# EAGLE board digi part 1 new board (EAGLE 9.6.2), part 1 of 2
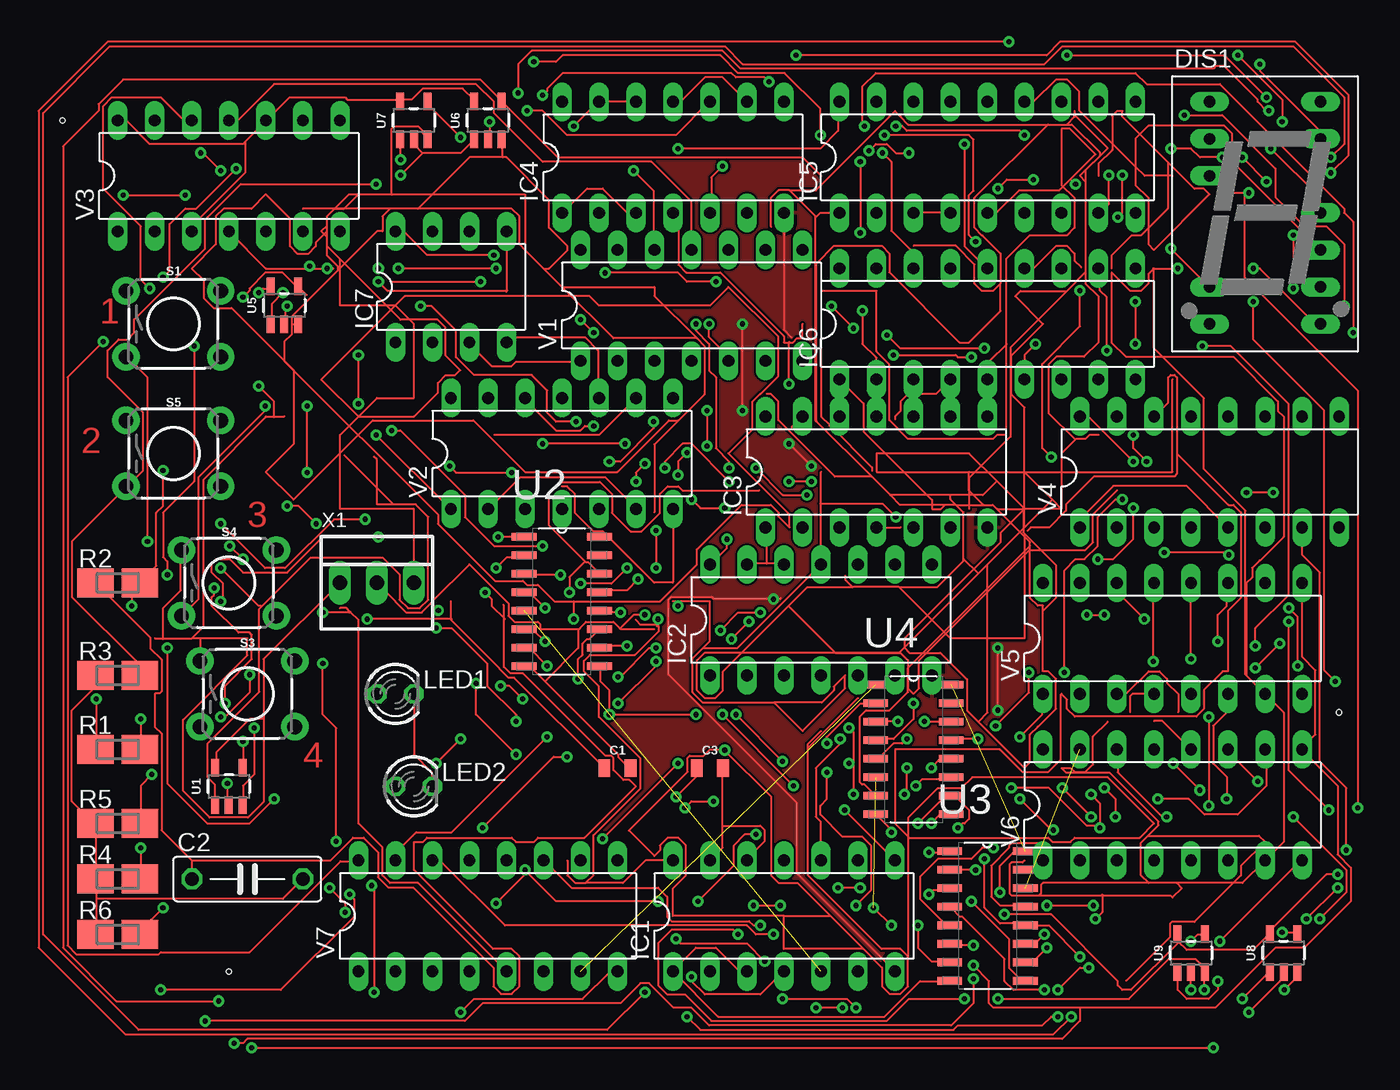
[diagram p0: board, top side]
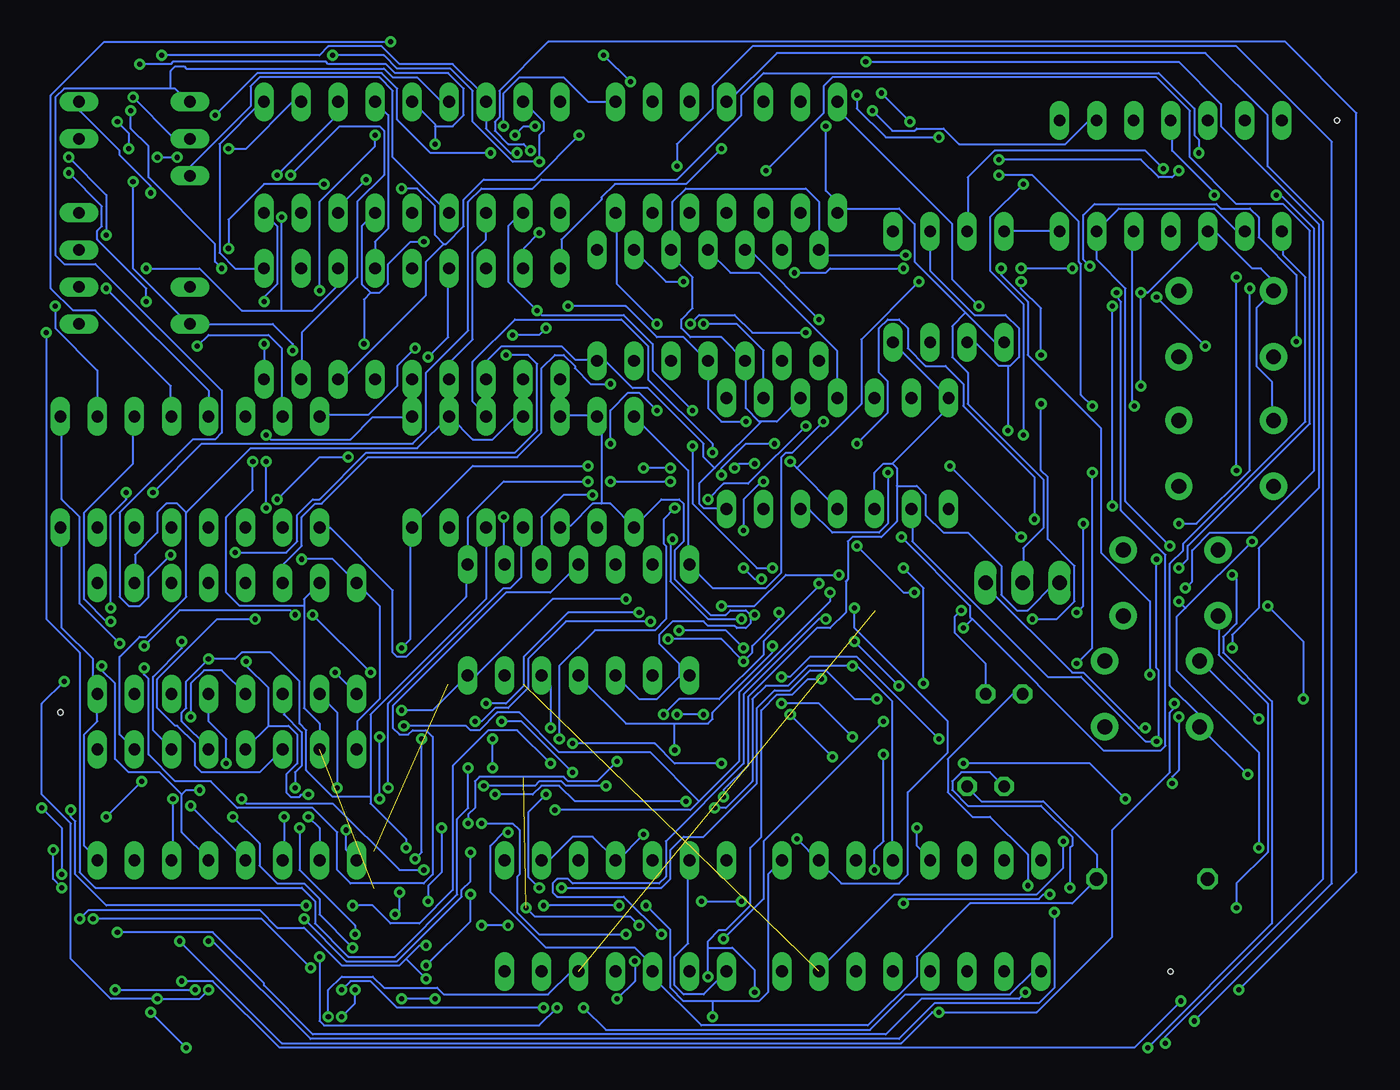
[diagram p1: board, bottom side, seen from below]

No outline drawn. Coordinates in mm, seen from the top.
Copper layers (1*16): Top 0.035mm / dielectric 1.5mm / Bottom 0.035mm
Design rules "default": minimum track width 6mil, minimum drill 0.35mm, track to track 6mil, track to pad 6mil, pad to pad 6mil, via to via 6mil, smd to smd 6mil, copper to edge 40mil, drill to drill 6mil, minimum pad ring 10mil, minimum via ring 8mil, stop-mask expansion 4mil, vias tented up to drill 0mil, thermal gap 10mil
Holes 0.35 mm at 10.16,5.08 -1.27,63.5 86.36,22.86

## Footprints (pad centres in the part's own frame; a part is rotated, then mirrored left to right if it is on the bottom)
0805 = smd 0.8 x 1.2: 1 -0.9,0; 2 0.9,0
C075-032X103 = drill 0.914 octagon: 1 -3.81,0; 2 3.81,0
HDSP-I = drill 0.813 long: 1 -3.81,7.62; 2 -3.81,5.08; 3 -3.81,2.54; 6 -3.81,-5.08; 7 -3.81,-7.62; 8 3.81,-7.62; 9 3.81,-5.08; 10 3.81,-2.54; 11 3.81,0; 13 3.81,5.08; 14 3.81,7.62
DIL14 = drill 0.813 long: 1 -7.62,-3.81; 2 -5.08,-3.81; 3 -2.54,-3.81; 4 0,-3.81; 5 2.54,-3.81; 6 5.08,-3.81; 7 7.62,-3.81; 8 7.62,3.81; 9 5.08,3.81; 10 2.54,3.81; 11 0,3.81; 12 -2.54,3.81; 13 -5.08,3.81; 14 -7.62,3.81
DIL18 = drill 0.813 long: 1 -10.16,-3.81; 2 -7.62,-3.81; 3 -5.08,-3.81; 4 -2.54,-3.81; 5 0,-3.81; 6 2.54,-3.81; 7 5.08,-3.81; 8 7.62,-3.81; 9 10.16,-3.81; 10 10.16,3.81; 11 7.62,3.81; 12 5.08,3.81; 13 2.54,3.81; 14 0,3.81; 15 -2.54,3.81; 16 -5.08,3.81; 17 -7.62,3.81; 18 -10.16,3.81
DIL08 = drill 0.813 long: 1 -3.81,-3.81; 2 -1.27,-3.81; 3 1.27,-3.81; 4 3.81,-3.81; 5 3.81,3.81; 6 1.27,3.81; 7 -1.27,3.81; 8 -3.81,3.81
LED3MM = drill 0.813 octagon: A -1.27,0; K 1.27,0
SMK = smd 2.5 x 2: 1 1.524,0; 2 -1.524,0
TACTILE_SWITCH_PTH_6.0MM = drill 1.016 pad 1.88: 1 -3.251,2.261; 2 3.251,2.261; 3 -3.251,-2.261; 4 3.251,-2.261
TACTILE_SWITCH_PTH_6.0MM_KIT = drill 1.016 pad 1.88: 1 -3.251,2.261; 2 3.251,2.261; 3 -3.251,-2.261; 4 3.251,-2.261
SOT23-5 = smd 0.55 x 1.2: 1 -0.95,-1.3; 2 0,-1.3; 3 0.95,-1.3; 4 0.95,1.3; 5 -0.95,1.3
SOIC127P600X175-16N = smd 1.702 x 0.533: 1 -2.591,4.445; 2 -2.591,3.175; 3 -2.591,1.905; 4 -2.591,0.635; 5 -2.591,-0.635; 6 -2.591,-1.905; 7 -2.591,-3.175; 8 -2.591,-4.445; 9 2.591,-4.445; 10 2.591,-3.175; 11 2.591,-1.905; 12 2.591,-0.635; 13 2.591,0.635; 14 2.591,1.905; 15 2.591,3.175; 16 2.591,4.445
DIL16 = drill 0.813 long: 1 -8.89,-3.81; 2 -6.35,-3.81; 3 -3.81,-3.81; 4 -1.27,-3.81; 5 1.27,-3.81; 6 3.81,-3.81; 7 6.35,-3.81; 8 8.89,-3.81; 9 8.89,3.81; 10 6.35,3.81; 11 3.81,3.81; 12 1.27,3.81; 13 -1.27,3.81; 14 -3.81,3.81; 15 -6.35,3.81; 16 -8.89,3.81
22-23-2031 = drill 1 long: 1 -2.54,0; 2 0,0; 3 2.54,0

## Placement (x,y rotation side)
C1  0.01uF  [0805]  36.83,19.05 0 top
C2  100uF  [C075-032X103]  11.43,11.43 0 top
C3  0.01uF  [0805]  43.18,19.05 0 top
DIS1  HD-E100  [HDSP-I]  81.28,57.15 0 top
IC1  74290N  [DIL14]  48.26,8.89 0 top
IC2  74290N  [DIL14]  50.8,29.21 0 top
IC3  74290N  [DIL14]  54.61,39.37 0 top
IC4  74290N  [DIL14]  40.64,60.96 0 top
IC5  4513N  [DIL18]  62.23,60.96 0 top
IC6  4513N  [DIL18]  62.23,49.53 0 top
IC7  ICM7555  [DIL08]  25.4,52.07 0 top
LED1  TLLY4400  [LED3MM]  21.59,24.13 0 top
LED2  TLLY4400  [LED3MM]  22.86,17.78 0 top
R1  1k  [SMK]  2.54,20.32 0 top
R2  15k  [SMK]  2.54,31.75 0 top
R3  15k  [SMK]  2.54,25.4 0 top
R4  15k  [SMK]  2.54,11.43 0 top
R5  15k  [SMK]  2.54,15.24 0 top
R6  15k  [SMK]  2.54,7.62 0 top
S1  MOMENTARY-SWITCH-SPST-PTH-6.0MM  [TACTILE_SWITCH_PTH_6.0MM]  6.35,49.53 0 top
S3  MOMENTARY-SWITCH-SPST-PTH-6.0MM-KIT  [TACTILE_SWITCH_PTH_6.0MM_KIT]  11.43,24.13 0 top
S4  MOMENTARY-SWITCH-SPST-PTH-6.0MM-KIT  [TACTILE_SWITCH_PTH_6.0MM_KIT]  10.16,31.75 0 top
S5  MOMENTARY-SWITCH-SPST-PTH-6.0MM-KIT  [TACTILE_SWITCH_PTH_6.0MM_KIT]  6.35,40.64 0 top
U1  74LVC1G08SE  [SOT23-5]  10.16,17.78 0 top
U2  74HC157D,652  [SOIC127P600X175-16N]  33.02,30.48 0 top
U3  74HC157D,652  [SOIC127P600X175-16N]  62.23,8.89 0 top
U4  74HC157D,652  [SOIC127P600X175-16N]  57.15,20.32 0 top
U5  74LVC1G08SE  [SOT23-5]  13.97,50.8 0 top
U6  74LVC1G08SE  [SOT23-5]  27.94,63.5 0 top
U7  74LVC1G08SE  [SOT23-5]  22.86,63.5 0 top
U8  SN74LVC1G32DCKR  [SOT23-5]  82.55,6.35 0 top
U9  SN74LVC1G32DCKR  [SOT23-5]  76.2,6.35 0 top
V1  7473N  [DIL14]  41.91,50.8 0 top
V2  7473N  [DIL14]  33.02,40.64 0 top
V3  7473N  [DIL14]  10.16,59.69 0 top
V4  7485AN  [DIL16]  77.47,39.37 0 top
V5  7485AN  [DIL16]  74.93,27.94 0 top
V6  7485AN  [DIL16]  74.93,16.51 0 top
V7  7485AN  [DIL16]  27.94,8.89 0 top
X1  22-23-2031  [22-23-2031]  20.32,31.75 0 top

## Library data of the parts
C1 C3 = SparkFun-Capacitors; PROD_ID: CAP-08469
C2 = rcl; SPICEPREFIX: C
DIS1 = display-hp; OC_FARNELL: unknown; OC_NEWARK: unknown
IC1-IC4 = 74xx-us
IC5 IC6 = 45xx
IC7 = maxim; MF: MAXIM; MPN: ICM7555IPA+; OC_FARNELL: 9663762; OC_NEWARK: 68K4387
LED1 LED2 = led; MF: VISHAY SEMICONDUCTOR; OC_FARNELL: 1612439
R1-R6 = resistor-shunt; OC_FARNELL: unknown; OC_NEWARK: unknown
S1 S3-S5 = SparkFun-Switches; PROD_ID: SWCH-08441; SF_SKU: COM-00097
U1 U5-U7 = SparkFun-IC-Logic; PROD_ID: IC-10841
U2-U4 = 74HC157D_652; AVAILABILITY: In Stock; DESCRIPTION: IC MULTIPLEXER 4 X 2:1 16SO; MF: Nexperia; MP: 74HC157D,652; PACKAGE: SO-16 Nexperia USA Inc.; PRICE: None; PURCHASE-URL: https://pricing.snapeda.com/search/part/74HC157D,652/?ref=eda
U8 U9 = SparkFun-IC-Logic; PROD_ID: IC-10842
V1-V7 = 74ttl-din
X1 = con-molex; MF: MOLEX; MPN: 22-23-2031; OC_FARNELL: 1462950; OC_NEWARK: 30C0862

## Nets
3.3V: C1.2 C2.2 C3.2 DIS1.6 IC1.1 IC1.3 IC1.12 IC1.13 IC2.1 IC2.3 IC2.12 IC2.13 IC3.1 IC3.3 IC3.12 IC3.13 IC4.1 IC4.3 IC4.12 IC4.13 IC5.5 IC6.5 IC7.1 LED1.K LED2.K R3.2 R4.2 R5.2 R6.2 U2.8 U3.8 U4.8 X1.2
5V: C3.1 DIS1.3 DIS1.14 IC5.3 IC5.4 IC6.3 IC6.4 IC7.4 IC7.8 R1.1 S1.1 S3.1 S4.1 S5.1 U1.5 U2.16 U3.16 U4.16 U5.5 U6.5 U7.5 U8.5 U9.5 V1.3 V1.7 V1.10 V1.14 V2.3 V2.7 V2.10 V2.14 V3.3 V3.7 V3.10 V3.14 X1.1
+UB: V1.4 V2.4 V3.4 V4.16 V5.16 V6.16 V7.16
-5V: U1.3 U5.3 U6.3 U7.3 U8.3 U9.3 X1.3
-UB: V1.11 V2.11 V3.11 V4.8 V5.8 V6.8 V7.8
GND: IC1.7 IC2.7 IC3.7 IC4.7
N$1: U1.1 V1.5 V1.12
N$2: U1.2 V1.9
N$3: U1.4 V2.2 V2.6 V3.2 V3.6
N$4: IC1.10 V2.12
N$5: IC1.9 IC1.11 U2.2 V4.10
N$6: IC2.9 IC2.11 U2.3 V4.9
N$7: U4.1 U6.1 U7.2 V7.7
N$8: IC4.9 IC4.11 U3.3 V5.9 V6.9
N$9: IC2.10 V2.9
N$10: IC3.10 V3.12
N$11: IC4.10 V3.9
N$12: IC4.8 U3.13 V5.1 V6.1
N$13: IC1.4 U2.11 V4.13
N$14: IC4.4 U3.10 V5.14 V6.14
N$15: IC4.5 U3.6 V5.11 V6.11
N$16: U2.1 U5.1 V4.7
N$17: V5.4 V6.4
N$18: V5.3 V6.3
N$19: V5.2 V6.2
N$20: IC3.8 U3.14 V5.15 V6.15
N$21: IC3.4 U3.11 V5.13 V6.13
N$22: IC3.5 U3.5 V5.12 V6.12
N$23: IC3.9 IC3.11 U3.2 V5.10 V6.10
N$24: U3.1 U6.2 V5.7 V6.7
N$25: V5.6 V6.6
N$26: U7.1 V5.5 V6.5
N$28: IC1.5 U2.5 V4.12
N$29: IC2.8 U2.13 V4.1 V4.5
N$30: IC2.4 U2.10 V4.14
N$31: IC1.8 U2.14 V4.15
N$32: IC2.5 U2.6 V4.11
N$33: IC5.1 IC6.1 U4.7
N$34: U3.7 U4.6 V7.11
N$35: IC5.2 IC6.2 U4.9
N$36: U5.2 V7.5
N$37: U2.4 U4.2 V7.10
N$38: U2.7 U4.5 V7.12
N$39: U2.9 U4.11 V7.13
N$40: U2.12 U4.14 V7.15
N$41: U3.4 U4.3 V7.9
N$43: U3.9 U4.10 V7.14
N$44: U3.12 U4.13 V7.1
N$46: LED2.A U9.4
N$47: IC5.6 IC6.6 U4.12
N$48: IC5.7 IC6.7 U4.4
N$49: IC5.8 IC6.8
N$50: IC5.10 IC6.10
N$51: DIS1.7 IC5.11 IC6.11
N$52: DIS1.8 IC5.12 IC6.12
N$53: DIS1.10 IC5.13 IC6.13
N$54: DIS1.13 IC5.14 IC6.14
N$55: DIS1.1 IC5.15 IC6.15
N$56: DIS1.11 IC5.16 IC6.16
N$57: DIS1.2 IC5.17 IC6.17
N$58: U5.4 U8.2
N$59: U7.4 U8.1 U9.2
N$60: U6.4 U9.1
N$61: LED1.A U8.4
N$62: IC7.3 V1.1
N$63: C1.1 IC7.5
N$64: R3.1 S5.3 V2.1
N$65: IC7.7 R1.2 R2.1
N$66: C2.1 IC7.2 IC7.6 R2.2
N$67: R5.1 S3.3 V3.1
N$68: R6.1 S4.3 V3.5
N$69: R4.1 S1.3 V2.5
VCC: IC1.14 IC2.14 IC3.14 IC4.14
VDD: IC5.18 IC6.18
VSS: IC5.9 IC6.9

## Tracks (layer width: path | path; a pad name or v marks a point on that pad's centre or on a via)
3.3V  (via drill 0.35)
  Top 0.152: 24.05,30.36 23.39,29.71 22.33,29.71 21.57,30.46 21.57,30.5 X1.2 | 24.05,30.36 24.15,30.46 24.15,30.5 26.67,33.02 29.35,30.34 29.35,29.48 29.76,29.07 31.38,29.07 31.51,28.94 31.51,28.57 34.17,28.57 34.27,28.67 | 39.37,28.57 37.05,28.57 37,28.62 | 34.27,28.67 34.66,29.07 36.56,29.07 37,28.62 | IC5.5 62.85,57.15 64.4,58.7 67.16,58.7 67.93,59.47 | 67.93,59.47 69.63,61.18 67.89,62.92 67.31,62.92 67.31,59.07 68.2,58.18 68.2,56.12 67.68,55.6 65.11,55.6 63.5,53.99 63.5,48.16 | 63.5,48.16 63.5,41.91 62.88,41.91 62.6,41.63 56.78,41.63 55.5,42.91 55.5,46.75 54.61,47.64 54.61,51.79 50.8,51.79 50.8,43.18 51.41,42.57 | 51.41,42.57 54.3,39.67 54.3,39.46 | 48.79,42.44 IC3.13 50.11,43.76 | v55.63,14.63 55.63,14.78 54.56,15.85 U4.8 | 44.04,15.09 44.04,13.56 IC1.13 | 44.04,15.09 44.04,19.05 C3.2 | 44.04,15.09 46.63,15.09 46.94,14.78 46.94,14.02 45.72,12.8 IC1.12 | U3.8 59.59,4.42 57.61,4.42 55.17,1.98 43.74,1.98 IC1.1 40.69,5.18 42.22,6.71 43.59,6.71 45.11,5.18 45.72,5.18 IC1.3 | 1.07,11.43 1.07,10.06 | 1.07,10.06 1.07,7.62 R6.2 | 1.07,11.43 1.07,15.24 R5.2 0.91,15.24 -0.61,16.76 -0.61,23.01 0.91,24.54 0.91,25.3 R3.2 | 1.07,11.43 R4.2 | LED1.K 22.86,19.96 24.08,18.75 24.08,17.83 LED2.K | 1.07,10.06 13.87,10.06 C2.2 | 31.85,24.99 30.94,25.91 30.48,25.91 U2.8 | 31.85,24.99 36.88,19.96 36.88,19.81 37.64,19.05 C1.2 | 31.85,24.99 34.14,27.28 34.14,28.5 34.29,28.65 34.27,28.67 | IC4.12 IC4.13 35.51,64.77 v33.83,63.09 | IC4.3 37.49,57.15 35.81,58.83 34.75,58.83 33.07,57.15 IC4.1 | 47.09,33.07 48.16,33.07 IC2.12 | 47.09,33.07 45.72,33.07 IC2.13 | 47.09,33.07 47.09,35.51 IC3.1 | IC6.5 62.33,45.72 62.33,46.94 63.55,48.16 63.5,48.16
  Top 0.152: v74.83,54.71 DIS1.6 | 67.93,59.47 v68.28,59.13 | 51.41,42.57 51.97,43.13 IC3.12 | 51.36,42.52 51.41,42.57 | 37,28.62 37.95,29.57 v38.71,29.57 | 24.05,30.36 v24.54,29.87
  Bottom 0.152: v55.63,14.63 55.93,14.63 56.84,13.72 56.84,10.52 53.03,6.71 46.94,6.71 45.72,5.49 IC1.3 45.72,4.72 42.37,1.37 30.94,1.37 27.58,4.72 27.58,6.1 23.93,9.75 16.92,9.75 C2.2 15.24,13.11 18.9,16.76 23.16,16.76 24.08,17.68 LED2.K | IC1.1 42.22,3.5 43.59,3.5 44.2,4.12 44.2,6.1 43.28,7.01 43.28,12.65 IC1.13 | 24.23,50.29 27.74,53.8 27.74,56.39 28.8,57.45 32.61,57.45 | 24.23,50.29 22.25,48.31 21.64,48.31 IC7.1 | 32.61,57.45 32.92,57.15 IC4.1 32.61,57.45 | v33.83,63.09 33.83,58.67 32.61,57.45 | 24.23,50.29 25.15,49.38 25.15,47.24 24.08,46.18 24.08,44.04 18.9,38.86 18.9,35.51 20.27,34.14 20.27,31.85 X1.2 | 43.89,25.3 43.28,25.3 IC2.1 | 43.89,25.3 45.41,23.77 46.63,23.77 IC2.3 | 49.23,37.19 48.62,37.19 IC3.1 46.94,35.66 45.11,37.49 43.89,37.49 43.59,37.19 43.59,34.59 44.2,33.98 44.2,32 41.76,29.57 40.69,29.57 40.39,29.87 39.32,29.87 39.01,29.57 | 49.23,37.19 49.84,37.19 51.36,35.66 51.97,35.66 IC3.3 | 43.89,25.3 43.89,26.21 45.26,27.58 45.26,28.19 44.35,29.11 42.22,29.11 41.91,28.8 40.08,28.8 39.93,28.65 39.32,28.65 39.01,28.96 39.01,29.57 | IC3.12 51.97,43.28 49.53,43.28 IC3.13 49.53,43.13 49.23,42.82 49.23,37.19 | v74.83,54.71 74.83,56.69 72.39,59.13 v68.28,59.13 | 39.01,29.57 v38.71,29.57 | LED1.K 22.86,26.21 24.99,28.35 24.99,29.41 v24.54,29.87
5V  (via drill 0.35)  (1 unrouted)
  Top 0.152: V2.7 40.64,31.8 40.62,31.77 39.34,31.77 35.87,35.26 | 35.87,35.26 35.84,35.28 35.19,35.28 33.91,36.56 33.91,37.86 33.39,38.38 33.02,38.38 | 5.08,27.94 5.64,27.94 | 5.64,27.94 7.62,27.94 | 7.62,27.94 8.43,28.75 8.43,38.86 12.7,43.13 12.7,43.18 13.26,43.18 | 13.26,43.18 13.97,43.18 | 12.55,22.4 12.55,26.52 X1.1 | 12.55,22.4 12.55,16.72 11.48,15.65 8.84,15.65 7.01,17.48 7.01,22.35 11.43,26.77 11.43,27.94 8.23,27.94 | 8.23,27.94 7.62,27.94 | 56.7,44.65 56.78,44.73 58.7,44.73 IC6.4 | 56.7,44.65 56.26,44.21 56.26,43.56 55.88,43.18 55.88,42.96 | 75.29,7.16 75.29,7.62 U9.5 75.29,7.16 | 75.29,7.16 75.89,6.55 80.47,6.55 81.53,7.62 U8.5 81.69,7.77 81.69,7.92 85.5,11.73 v86.26,11.73 | v63.09,10.52 63.09,12.34 64.01,13.26 64.77,13.26 U3.16 | v63.4,8.99 66.6,8.99 71.17,4.42 71.17,4.12 71.48,3.81 72.08,3.81 75.29,7.01 75.29,7.16 | IC5.4 IC5.3 | 79.86,58.52 78.64,58.52 DIS1.3 | v87.63,16.31 87.63,44.96 79.86,52.73 79.86,58.52 | 79.86,58.52 v80.16,58.52 | v28.35,54.25 23.77,54.25 22.25,55.78 21.64,55.78 IC7.8 | IC6.3 56.69,45.26 56.69,44.65 56.7,44.65 | 35.87,35.26 35.66,35.05 U2.16 | v12.19,51.66 12.5,51.97 12.95,51.97 U5.5 | U6.5 26.98,64.92 26.21,65.68 23.47,65.68 22.71,64.92 21.95,64.92 U7.5 21.79,64.92 18.29,64.92 18.14,65.08 14.33,65.08 12.8,63.55 V3.10 12.65,63.4 11.28,62.03 | 11.28,62.03 11.12,61.87 4.72,61.87 3.2,63.4 2.59,63.4 V3.14 | V3.3 7.62,56.24 11.28,59.89 11.28,62.03 | 12.55,22.4 11.58,22.4 9.3,20.12 9.3,19.2 U1.5 | v4.12,22.4 4.12,20.42 R1.1 | 8.23,27.94 8.23,26.52 S3.1 | 5.64,27.94 5.64,30.02 6.86,31.24 6.86,33.98 S4.1 | 5.64,27.89 5.64,27.94 | v40.84,17.07 42.22,18.44 42.22,19.05 C3.1
  Top 0.152: v12.19,45.26 13.26,44.2 13.26,43.18 | 13.26,43.13 13.26,43.18 | IC7.4 29.57,48.62 34.59,48.62 35.51,47.7 35.51,44.5 V2.10
  Bottom 0.152: v63.09,10.52 63.09,9.3 v63.4,8.99 | DIS1.3 77.42,59.74 77.42,60.35 73.3,64.47 73.3,65.84 72.69,66.45 64.47,66.45 63.55,65.53 63.55,60.96 59.74,57.15 IC5.4 | v80.16,58.52 80.16,58.98 82.3,61.11 82.3,61.42 85.04,64.16 85.04,64.77 DIS1.14 | v86.26,11.73 86.26,14.94 v87.63,16.31 | V3.7 17.83,55.93 21.49,55.93 IC7.8 | v28.35,54.25 33.98,54.25 34.29,54.56 V1.14 34.29,57.91 35.2,58.83 43.43,58.83 44.35,57.91 44.35,54.71 V1.10 44.35,54.56 44.35,54.1 42.98,52.73 42.98,50.6 43.74,49.84 43.74,49.23 43.13,48.62 41,48.62 V1.3 39.32,46.94 39.32,43.74 38.41,42.82 38.25,42.82 | IC6.3 57.15,46.94 56.08,48.01 51.97,48.01 51.05,47.09 49.53,47.09 V1.7 49.53,46.94 48.92,46.94 47.09,45.11 46.02,45.11 42.22,41.3 42.22,40.39 41.45,39.62 | 38.25,42.82 41.45,39.62 | 41.45,39.62 42.52,38.56 42.52,37.19 42.22,36.88 40.69,36.88 V2.7 | 38.25,42.82 37.19,42.82 V2.10 | 7.62,55.78 11.73,51.66 v12.19,51.66 v12.19,45.26 | S5.1 3.2,42.98 3.2,45.57 4.27,46.63 4.27,50.6 3.2,51.66 S1.1 3.2,51.82 3.2,52.58 3.96,53.34 4.57,53.34 7.01,55.78 7.62,55.78 | 7.62,55.78 V3.3 | v4.12,22.4 8.08,26.36 S3.1 | IC7.4 V2.14 25.45,44.35 25.45,43.74 29.26,39.93 | v40.84,17.07 40.84,17.53 39.17,19.2 39.17,23.93 34.44,28.65 33.53,28.65 32.46,29.72 32.46,31.85 32.31,32 32.31,34.59 32,34.9 30.02,34.9 28.96,35.97 28.96,38.41 | 28.96,38.41 28.96,39.62 29.26,39.93 | 29.26,39.93 29.87,39.93 30.48,39.32 V2.3 | 28.96,38.41 27.58,38.41 26.98,37.8 26.98,36.42 25.76,35.2 24.08,35.2 21.79,32.92 21.79,30.94 20.73,29.87 19.96,29.87 18.14,31.7 17.83,31.7 X1.1 | IC5.3 57.15,55.32 58.06,54.41 58.06,48.46 59.59,46.94 59.59,45.72 IC6.4
+UB  (via drill 0.35)
  Top 0.152: V3.4 12.7,53.34 15.7,53.34 | 15.7,53.34 v16.92,53.34 17.35,53.34 | v72.24,40.08 69.19,43.13 68.58,43.13 V4.16 | v72.24,36.88 72.24,34.75 70.87,33.38 v69.8,33.38 | v36.27,40.08 37.03,40.08 39.32,42.37 v39.32,42.82 | v1.52,48.31 -0.91,45.87 -0.91,6.86 -0.3,6.25 5.33,6.25 5.49,6.4 11.58,6.4 17.83,12.65 19.05,12.65 V7.16 | 15.7,53.34 v15.7,53.49 | v27.43,52.43 21.34,52.43 v20.42,53.34 | v62.03,47.85 56.24,47.85 v55.32,48.77 | v51.51,50.75 v53.03,49.23
  Bottom 0.152: V6.16 65.99,20.42 65.99,22.25 64.47,23.77 64.47,30.18 V5.16 67.67,33.38 v69.8,33.38 | v72.24,36.88 v72.24,40.08 | v36.27,40.08 35.81,39.62 | 35.81,39.62 V2.4 | v39.32,42.82 41,42.82 41.91,43.74 41.91,46.94 | v1.52,48.31 1.52,52.88 4.12,55.47 4.12,56.84 4.72,57.45 6.71,57.45 7.01,57.76 15.39,57.76 16.15,57 16.15,53.95 v15.7,53.49 | 35.81,39.62 31.39,44.04 31.39,48.46 v27.43,52.43 | v16.92,53.34 v20.42,53.34 | v62.03,47.85 63.25,46.63 63.25,45.26 65.23,43.28 68.58,43.28 V4.16 | v55.32,48.77 53.49,48.77 v53.03,49.23 | v51.51,50.75 47.55,50.75 45.41,48.62 43.59,48.62 41.91,46.94 | 41.91,46.94 V1.4
-5V  (via drill 0.35)
  Top 0.152: X1.3 22.86,36.83 17.78,36.83 17.78,41.91 20.32,44.45 22.86,44.45 22.86,49.53 21.59,50.8 17.78,50.8 17.78,53.96 | 16.89,55.5 16.89,55.88 16.13,55.12 16.13,54.85 15.61,54.33 14.87,54.33 14.35,54.85 14.35,56.77 12.7,58.42 11.71,57.43 9.79,57.43 9.27,56.91 9.27,54.99 7.62,53.34 8.43,52.53 8.43,51.31 9.12,50.62 10.34,50.62 14.61,46.35 14.61,41.27 12.7,39.37 14.61,37.47 20.04,42.9 26.95,42.9 30.48,39.37 36.83,39.37 40.36,42.9 41.01,42.9 | 17.78,53.96 16.89,54.85 16.89,55.5 | 33.02,52.07 36.55,48.54 42.28,48.54 | 30.48,54.61 31.75,53.34 | 30.48,54.61 30.48,58.42 21.34,58.42 | 16.89,56.26 16.51,55.88 16.89,55.5 | 17.41,57.43 18.4,58.42 19.05,58.42 | 17.78,53.96 21.93,49.81 24.5,49.81 25.02,49.29 25.02,47.37 26.04,46.35 25.68,46 25.03,46 24.51,45.48 24.51,44.83 22.86,43.18 19.05,43.18 16.51,45.72 22.23,51.44 34.92,51.44 35.56,50.8 43.18,50.8 44.45,52.07 47.88,48.64 47.88,45.96 46.65,44.73 46.62,44.73 46.1,44.21 46.1,42.29 44.45,40.64 48.64,36.45 48.64,35.56 47.88,36.32 47.88,36.59 47.36,37.11 45.35,37.11 42.29,34.05 42.29,33.02 39.75,30.48 33.83,30.48 | 14.47,49.53 14.47,50.03 17.65,53.21 | 14.47,49.53 14.47,48.8 13.97,48.3 13.97,46.99 24.51,36.45 24.51,35.8 28.42,31.89 30.34,31.89 30.62,31.61 31.38,31.61 32.51,30.48 33.83,30.48 | 21.22,57.43 20.7,56.91 20.7,55.88 20.32,55.88 17.65,53.21 | 23.14,57.43 21.22,57.43 | 28.96,60.96 29.21,60.96 32.13,58.04 32.13,56.12 33.4,54.85 33.4,54.61 32.13,53.34 31.75,53.34 | 28.96,60.96 26.67,60.96 23.14,57.43 | 31.75,53.34 33.02,52.07 | 33.02,52.07 39.37,52.07 39.37,51.45 42.28,48.54 | 19.05,58.42 21.34,58.42
  Top 0.152: 30.48,54.61 30.1,54.99 30.1,56.91 29.58,57.43 23.14,57.43 | 21.22,57.43 15.24,57.43 | 17.65,53.21 17.65,53.47 16.89,54.23 16.89,56.26 | 16.89,56.26 16.89,56.91 17.41,57.43 | 17.41,57.43 18.06,57.43 19.05,58.42 | 42.28,48.54 42.8,48.02 42.8,44.69 41.01,42.9 | 41.01,42.9 39.37,41.26 39.37,36.61 | v77.11,3.81 77.11,5.03 U9.3 77.11,5.18 76.81,5.49 76.81,5.64 76.5,5.94 74.68,5.94 71.93,3.2 v62.94,3.2 | v82.6,3.81 83.36,4.57 83.36,5.03 U8.3 | v11.89,21.79 11.89,18.59 11.12,17.83 11.12,16.61 U1.3 | 14.47,49.53 14.78,49.53 U5.3 | 21.34,58.42 21.34,62.94 21.49,63.09 23.16,63.09 23.47,62.79 23.47,62.64 23.77,62.33 U7.3 | 21.34,58.37 21.34,58.42 | 28.96,60.96 28.96,62.18 U6.3 | v60.66,3.2 56.84,3.2 55.32,1.68 43.28,1.68 41.45,3.5 40.23,3.5 39.62,4.12 39.62,7.01 40.54,7.92 44.81,7.92 v45.11,7.62 | 33.83,30.48 v33.83,29.26
  Bottom 0.152: v82.6,3.81 v77.11,3.81 | v11.89,21.79 12.34,21.79 16.15,25.6 16.92,25.6 22.86,31.55 X1.3 | v60.66,3.2 v62.94,3.2 | v45.11,7.62 47.7,10.21 52.27,10.21 52.58,10.52 52.58,11.12 52.27,11.43 51.51,11.43 51.21,11.12 45.26,11.12 44.81,11.58 44.81,14.02 39.47,19.36 39.47,24.08 34.29,29.26 v33.83,29.26
-UB  (via drill 0.35)
  Top 0.152: V1.11 41.91,57.91 39.17,60.66 31.7,60.66 28.35,64.01 28.35,64.77 27.13,65.99 13.26,65.99 10.82,63.55 10.21,63.55 V3.11 | v26.06,2.29 26.98,3.2 34.44,3.2 36.27,5.03 36.73,5.03 V7.8 | v78.18,7.16 83.82,12.8 V6.8 | v2.9,58.37 v7.16,58.37 | v9.14,31.39 9.14,30.94 8.99,30.79 8.99,30.18 10.82,28.35 11.58,28.35 11.73,28.19 11.73,26.52 9.91,24.69 v9.91,23.47
  Bottom 0.152: V2.11 33.07,44.5 33.07,47.7 38.41,53.03 40.39,53.03 41.91,54.56 V1.11 | v78.18,7.16 71.17,0.15 28.65,0.15 26.52,2.29 v26.06,2.29 19.36,2.29 14.17,7.47 14.17,14.78 10.21,18.75 10.21,22.86 9.91,23.16 v9.91,23.47 | V6.8 83.82,12.8 84.73,13.72 84.73,21.34 83.82,22.25 V5.8 83.82,24.23 84.12,24.54 84.12,26.52 86.26,28.65 86.26,35.51 V4.8 | v7.16,58.37 7.16,58.52 10.06,61.42 10.06,63.4 V3.11 | v2.9,58.37 2.59,58.37 0.3,56.08 0.3,39.47 4.57,35.2 7.47,35.2 8.69,33.98 8.69,31.85 v9.14,31.39
GND  (via drill 0.35)
  Top 0.152: IC1.7 49.15,11.81 49.15,16.65 40.34,25.46 40.34,30.61 40.51,30.79 43.31,30.79 43.4,30.7 47.55,30.7 | 47.55,30.7 48.04,30.7 | IC4.7 48.26,49.12 48.79,48.59 | v47.55,30.63 47.55,30.7 | v62.94,23.01 v62.94,27.28 | v45.41,43.59 v45.41,49.53 | v50.14,39.78 v48.62,41.3
  Bottom 0.152: v47.55,30.63 52.58,30.63 57.76,25.45 58.37,25.45 IC2.7 60.81,23.01 v62.94,23.01 | v62.94,27.28 62.33,27.89 62.33,35.51 IC3.7 62.18,35.66 58.06,39.78 v50.14,39.78 | v45.41,49.53 48.16,52.27 48.16,57.15 IC4.7 | v45.41,43.59 46.63,44.81 47.4,44.81 48.62,43.59 v48.62,41.3
  pour Top (isolate 0.013): -2.54,72.39 90.17,72.39 90.17,-1.27 -5.08,-1.27 -5.08,72.39
  pour Top (isolate 0.254): -5.08,73.66 90.17,73.66 90.17,-1.27 -3.81,-1.27 -5.08,0 -5.08,73.66
  pour Top (isolate 0.013): -3.81,73.66 92.71,73.66 92.71,-3.81 -5.08,-3.81 -5.08,72.39
N$1  (via drill 0.35)
  Top 0.152: 21.46,37.13 22.99,37.13 23.84,36.28 23.84,30.59 23.27,30.01 22.45,30.01 21.88,30.59 21.88,32.34 20.73,33.49 15.76,33.49 12.39,30.12 | 21.46,37.13 20.32,37.13 20.32,40.21 20.1,40.42 | U1.1 9.21,17.88 8.71,18.39 8.71,20.75 12.24,24.28 12.24,29.97 12.39,30.12 | 21.46,37.13 18.09,40.51 | v35.2,48.92 v34.29,49.84 | v43.13,49.53 43.13,48.62 44.35,47.4 44.35,47.09 V1.5 | v37.95,60.05 39.32,58.67 39.32,54.71 V1.12 | v9.6,32.77 12.19,30.18 12.34,30.18 12.39,30.12
  Bottom 0.152: v34.29,49.84 39.01,54.56 39.32,54.56 V1.12 | v35.2,48.92 38.86,48.92 40.08,50.14 42.52,50.14 v43.13,49.53 | v37.95,60.05 33.98,64.01 33.98,65.84 33.38,66.45 11.12,66.45 8.84,64.16 8.84,60.96 5.64,57.76 2.44,57.76 0.61,55.93 0.61,42.67 8.99,34.29 8.99,33.38 v9.6,32.77
N$2  (via drill 0.35)
  Top 0.152: v10.06,17.98 10.06,16.61 U1.2 | v9.6,22.55 9.91,22.55 11.58,24.23 v11.58,25.45 | v28.5,53.34 v21.79,53.34 | v35.97,53.03 41,53.03 41.6,52.43 v43.59,52.43
  Bottom 0.152: v10.06,17.98 10.06,18.44 9.6,18.9 v9.6,22.55 | v11.58,25.45 11.58,30.48 14.94,33.83 14.94,42.37 19.96,47.4 19.96,51.05 21.79,52.88 v21.79,53.34 | v28.5,53.34 33.53,53.34 33.83,53.03 v35.97,53.03 | v43.59,52.43 44.81,52.43 V1.9
N$3  (via drill 0.35)
  Top 0.152: v11.12,20.88 11.12,19.2 U1.4 | V2.6 38.1,36.88 35.97,39.01 30.18,39.01 28.04,36.88 V2.2 | v11.12,33.38 v10.21,34.29
  Bottom 0.152: V3.2 5.18,55.93 5.64,55.93 7.16,57.45 13.72,57.45 15.24,55.93 V3.6 15.24,53.95 13.26,51.97 13.26,37.34 v10.21,34.29 | V2.2 27.89,36.73 27.89,34.59 18.59,25.3 16.31,25.3 11.89,20.88 v11.12,20.88 10.97,21.03 10.97,25.76 11.12,25.91 v11.12,33.38
N$4  (via drill 0.35)
  Top 0.152: v52.12,21.03 52.12,20.73 50.44,19.05 50.44,15.7 50.75,15.39 50.75,12.8 IC1.10 | v44.2,36.88 42.52,36.88 v41.91,37.49 | v35.2,42.52 34.59,42.52 34.29,42.22 32.61,42.22 30.48,44.35 V2.12
  Bottom 0.152: v52.12,21.03 52.12,26.06 49.68,28.5 45.57,28.5 44.81,29.26 44.81,34.29 44.96,34.44 44.96,36.12 v44.2,36.88 | v41.91,37.49 40.84,38.56 39.17,38.56 v35.2,42.52
N$5  (via drill 0.35)
  Top 0.152: v28.5,32.77 29.26,33.53 30.33,33.53 U2.2 | v27.13,24.84 27.13,22.71 v29.87,19.96 | 30.63,11.89 32.61,9.91 v39.62,9.91 | v42.37,9.91 44.81,12.34 44.81,13.72 45.57,14.48 v46.33,14.48 | v86.72,50.75 86.72,55.02 85.5,56.24 83.97,56.24 81.99,58.22 81.99,60.2 78.33,63.86 v75.74,63.86 | v56.84,61.27 55.93,61.27 55.32,61.87 54.56,61.87 v54.1,61.42 | v5.49,3.81 13.72,3.81 18.75,8.84 18.75,10.06 v18.44,10.36 | 30.63,11.89 v28.5,9.75 | 30.63,11.89 v30.48,12.04
  Bottom 0.152: v28.5,32.77 27.13,31.39 v27.13,24.84 | v29.87,19.96 29.87,14.02 30.48,13.41 v30.48,12.04 | v42.37,9.91 v39.62,9.91 | v46.33,14.48 48.16,12.65 IC1.11 48.31,12.8 49.84,14.33 51.21,14.33 52.73,12.8 53.34,12.8 IC1.9 | V4.10 83.82,46.33 86.72,49.23 v86.72,50.75 | v75.74,63.86 72.85,66.75 64.31,66.75 63.25,65.68 63.25,63.55 60.96,61.27 v56.84,61.27 | v54.1,61.42 54.56,61.87 55.63,61.87 56.54,62.79 56.54,63.4 56.24,63.7 56.24,65.53 52.88,68.89 2.29,68.89 -2.59,64.01 -2.59,11.89 v5.49,3.81 | v18.44,10.36 18.9,10.36 19.2,10.06 28.19,10.06 v28.5,9.75
N$6  (via drill 0.35)
  Top 0.152: 42.69,27.25 45.03,27.25 IC2.11 50.8,37.19 | 47.57,23.55 49.53,21.59 52.45,24.51 52.45,25.4 51.69,24.64 51.69,24.37 50.86,23.55 47.57,23.55 | 47.57,23.55 42.69,23.55 41.99,24.25 41.99,26.55 42.69,27.25 | 42.69,27.25 43.18,27.75 43.18,30.48 41,30.48 | 41,30.48 40.64,30.48 | 50.8,37.19 50.8,39.37 | v32.92,32.31 30.48,32.31 U2.3 | 41,30.48 v41,30.18 | v55.93,36.27 55.02,37.19 50.8,37.19 | 50.75,37.19 50.8,37.19 | v80.62,25.91 v82.3,27.58
  Bottom 0.152: v32.92,32.31 36.58,32.31 38.71,30.18 v41,30.18 | v55.93,36.27 55.93,33.07 IC2.9 | v82.3,27.58 85.04,30.33 85.04,36.27 86.26,37.49 86.26,43.13 V4.9 | v80.62,25.91 80.62,25.45 80.31,25.15 80.31,19.96 78.49,18.14 76.05,18.14 74.22,16.31 69.04,16.31 67.36,14.63 67.36,12.04 66.45,11.12 61.42,11.12 60.81,11.73 60.81,21.18 61.27,21.64 62.18,21.64 62.48,21.34 63.09,21.34 63.55,21.79 63.55,23.32 55.78,31.09 52.73,31.09 IC2.11
N$7  (via drill 0.35)  (1 unrouted)
  Top 0.152: U7.2 22.86,61.87 23.47,61.27 | 23.47,61.27 26.06,61.27 26.98,62.18 U6.1 | v21.95,59.74 23.47,61.27 | v15.54,39.32 v15.54,43.89 | v16.61,26.21 16.61,22.71 17.53,21.79 v17.53,14.02
  Bottom 0.152: v21.95,59.74 19.66,59.74 16.46,56.54 16.46,53.8 16.31,53.65 16.31,44.65 v15.54,43.89 | v15.54,39.32 15.54,27.28 v16.61,26.21 | v17.53,14.02 17.53,12.19 19.36,10.36 29.11,10.36 34.29,5.18 V7.7
N$8  (via drill 0.35)
  Top 0.152: IC4.11 41.15,64.77 42.82,66.45 44.04,66.45 IC4.9 | v58.22,10.36 58.52,10.67 59.59,10.67 U3.3 | v61.27,5.49 62.33,4.42 62.33,2.9 62.64,2.59 68.58,2.59 | 68.58,2.59 77.88,2.59 81.99,6.71 83.97,6.71 87.17,9.91 87.17,12.19 86.26,13.11 86.26,17.83 83.82,20.27 V6.9 83.82,20.42 84.73,21.34 84.73,25.76 83.82,26.67 V5.9 | v10.52,0.15 11.12,0.15 11.43,0.46 67.36,0.46 68.58,1.68 68.58,2.59
  Bottom 0.152: v58.22,10.36 58.22,8.53 v61.27,5.49 | v10.52,0.15 10.52,0.61 -0.3,11.43 -0.3,56.54 3.5,60.35 3.5,63.86 7.77,68.12 37.19,68.12 40.54,64.77 IC4.11
N$9  (via drill 0.35)
  Top 0.152: V2.9 35.56,41.91 28.37,41.91 | v49.84,37.8 48.16,37.8 v46.33,39.62 | v44.5,39.62 44.5,40.08 43.59,41 43.59,45.87 43.13,46.33 43.13,48.16 42.22,49.07 v42.22,49.53
  Bottom 0.152: IC2.10 53.34,36.27 51.82,37.8 v49.84,37.8 | v44.5,39.62 v46.33,39.62 | v42.22,49.53 39.93,49.53 38.1,47.7 V2.9
N$10  (via drill 0.35)
  Top 0.152: v4.72,51.97 4.12,52.58 4.12,56.24 1.52,58.83 1.52,64.47 2.13,65.08 5.49,65.08 7.01,63.55 7.62,63.55 V3.12 | v9.6,35.81 12.65,32.77 14.02,32.77 17.37,36.12 v19.51,36.12 | v37.34,41.3 v31.7,41.3 | v41,39.17 41,40.08 v41.6,40.69
  Bottom 0.152: v4.72,51.97 4.72,39.47 8.38,35.81 v9.6,35.81 | v19.51,36.12 19.51,39.01 24.38,43.89 24.38,45.41 25.6,46.63 26.98,46.63 28.19,47.85 28.19,49.23 28.8,49.84 29.57,49.84 30.18,49.23 30.18,46.18 29.57,45.57 29.57,43.43 v31.7,41.3 | v37.34,41.3 39.32,41.3 41,39.62 v41,39.17 | v41.6,40.69 41.6,41.3 46.02,45.72 46.02,48.01 47.85,49.84 55.17,49.84 58.06,46.94 58.06,44.2 57.15,43.28 IC3.10
N$11  (via drill 0.35)
  Top 0.152: v30.63,64.16 31.7,64.16 33.38,62.48 40.84,62.48 43.13,64.77 IC4.10
  Bottom 0.152: v30.63,64.16 29.26,62.79 27.74,62.79 27.58,62.94 25.76,62.94 24.69,61.87 17.37,61.87 15.85,63.4 15.24,63.4 V3.9
N$12  (via drill 0.35)
  Top 0.152: U3.13 64.77,9.6 63.09,9.6 62.48,10.21 62.48,12.34 63.7,13.56 63.7,13.72 63.86,13.87 65.84,13.87 65.99,13.72 65.99,12.8 V6.1 | v64.47,21.18 65.99,22.71 65.99,24.08 V5.1 | v64.47,16.92 66.6,14.78 v66.75,14.78 | v55.93,63.09 56.39,63.09 56.69,62.79 64.47,62.79 v64.77,62.48 | v68.58,51.82 68.58,49.38 65.99,46.79 65.99,41 v66.6,40.39 | v71.48,37.49 71.02,37.49 69.8,36.27 69.8,34.29 68.89,33.38 68.28,33.38 67.51,32.61 v67.51,25.6
  Bottom 0.152: v64.47,16.92 v64.47,21.18 | v66.75,14.78 66.75,13.41 V6.1 | IC4.8 50.14,64.77 51.82,66.45 54.86,66.45 55.93,65.38 v55.93,63.09 | v64.77,62.48 64.77,61.72 68.58,57.91 v68.58,51.82 | v66.6,40.39 68.58,40.39 v71.48,37.49 | V5.1 v67.51,25.6
N$13  (via drill 0.35)
  Top 0.152: v34.14,25.15 34.14,26.52 34.44,26.82 34.44,27.58 34.75,27.89 34.9,27.89 35.51,28.5 U2.11 | v41.91,4.72 41.91,4.42 42.82,3.5 46.63,3.5 48.16,5.03 IC1.4 | v83.21,55.63 v83.21,51.97 | v85.8,60.96 86.72,61.87 86.72,65.08 83.21,68.58 67.36,68.58 66.14,67.36 45.41,67.36 44.2,68.58 1.98,68.58 -2.59,64.01 -2.59,7.62 3.96,1.07 36.12,1.07 v38.71,3.66
  Bottom 0.152: v34.14,25.15 35.05,25.15 36.12,24.08 37.19,24.08 38.25,23.01 38.25,14.33 39.01,13.56 39.01,9.6 40.69,7.92 41.15,7.92 41.91,7.16 41.91,6.71 | v41.91,4.72 41.91,6.71 | V4.13 76.2,44.96 v83.21,51.97 | v83.21,55.63 83.21,58.37 v85.8,60.96 | v38.71,3.66 38.71,5.18 40.23,6.71 41.91,6.71
N$14  (via drill 0.35)
  Top 0.152: IC4.4 41.02,56.77 41.02,53.58 41.54,53.06 43.89,53.06 48.26,48.69 48.26,48.26 48.62,48.26 | 48.62,48.26 48.88,48.26 49.16,48.54 49.53,48.54 49.53,49.53 | v66.29,6.71 65.38,5.79 64.92,5.79 U3.10 | v74.52,15.7 74.22,15.7 71.17,18.75 71.17,20.27 V6.14 | v73,29.26 71.17,31.09 71.17,31.7 V5.14 | v48.62,45.41 48.62,48.26 | 48.62,48.31 48.62,48.26
  Bottom 0.152: v66.29,6.71 68.58,8.99 68.58,10.06 69.65,11.12 71.48,11.12 72.69,12.34 72.69,13.87 v74.52,15.7 | v73,29.26 75.59,29.26 79.7,25.15 79.7,23.16 78.49,21.95 78.33,21.95 77.11,20.73 77.11,19.2 76.66,18.75 72.69,18.75 V6.14 | v48.62,45.41 49.99,45.41 51.05,46.48 51.05,46.63 51.82,47.4 52.43,47.4 53.34,46.48 53.34,42.06 55.02,40.39 65.23,40.39 68.43,37.19 68.89,37.19 69.8,36.27 69.8,34.29 71.02,33.07 71.02,31.85 V5.14
N$15  (via drill 0.35)
  Top 0.152: v61.27,6.86 59.74,6.86 U3.6 | v85.04,8.69 86.87,10.52 86.87,12.04 v83.21,15.7 | v80.77,18.14 78.64,20.27 V6.11 | v78.03,27.74 78.03,29.57 78.64,30.18 78.64,31.7 V5.11 | v44.04,60.35 43.28,59.59 43.28,57.15 IC4.5 | v8.53,1.68 26.36,1.68 27.58,2.9 37.03,2.9 38.41,4.27 39.01,4.27 40.69,2.59 41.91,2.59 43.13,1.37 59.74,1.37 61.27,2.9 v61.27,4.57
  Bottom 0.152: v61.27,6.86 61.72,6.86 62.64,5.94 | 62.64,5.94 63.09,5.49 67.06,5.49 69.65,8.08 71.48,8.08 72.69,9.3 84.43,9.3 v85.04,8.69 | v80.77,18.14 v83.21,15.7 | v78.03,27.74 78.03,27.28 80.01,25.3 80.01,21.64 78.79,20.42 V6.11 | v44.04,60.35 44.04,61.87 41.6,64.31 41.6,65.84 38.86,68.58 5.64,68.58 -0.91,62.03 -0.91,11.12 v8.53,1.68 | 62.64,5.94 v61.27,4.57
N$16  (via drill 0.35)
  Top 0.152: v13.87,51.66 13.11,50.9 13.11,49.53 U5.1 | v28.65,34.9 30.33,34.9 U2.1 | V4.7 83.82,33.68 85.04,32.46 85.04,19.51 86.87,17.68 v86.87,13.41 | v84.12,8.69 v86.26,10.82 | v69.19,5.33 68.58,5.33 v67.06,3.81 | v53.19,2.59 52.58,3.2 v48.16,3.2 | v46.94,5.79 45.72,7.01 41.15,7.01 v40.84,7.32 | v29.87,22.25 29.87,22.71 27.89,24.69 27.89,26.21 25.45,28.65 v24.38,28.65
  Bottom 0.152: v13.87,51.66 13.87,51.36 13.56,51.05 13.56,36.73 10.52,33.68 10.52,20.57 10.82,20.27 14.78,20.27 23.77,29.26 | 23.77,29.26 23.93,29.41 23.93,30.18 v28.65,34.9 | v86.87,13.41 86.87,11.43 v86.26,10.82 | v84.12,8.69 72.54,8.69 v69.19,5.33 | v67.06,3.81 66.45,4.42 65.08,4.42 63.25,2.59 v53.19,2.59 | v48.16,3.2 46.94,4.42 v46.94,5.79 | v40.84,7.32 38.1,10.06 38.1,14.02 v29.87,22.25 | 23.77,29.26 v24.38,28.65
N$17  (via drill 0.35)
  Top 0.152: V5.4 72.17,24.13 72.01,23.97 72.01,22.89 | v77.42,22.55 v77.42,16.46
  Bottom 0.152: v77.42,16.46 V6.4 | v77.42,22.55 77.42,24.84 76.5,25.76 75.29,25.76 V5.4
N$18  (via drill 0.35)
  Top 0.152: V5.3 71.74,24.13 73.29,25.68 74.03,25.68 74.55,25.16 74.55,24.89 75.31,24.13 75.31,22.89 | v71.02,15.7 71.02,16.92 v70.26,17.68
  Bottom 0.152: v71.02,15.7 71.02,12.8 V6.3 | v70.26,17.68 70.26,18.75 69.8,19.2 69.8,21.49 71.02,22.71 71.02,24.08 V5.3
N$19  (via drill 0.35)
  Top 0.152: v67.36,17.68 v69.34,15.7
  Bottom 0.152: V6.2 68.58,14.94 v69.34,15.7 | v67.36,17.68 67.36,22.86 68.58,24.08 V5.2
N$20  (via drill 0.35)  (1 unrouted)
  Top 0.152: v72.24,41.91 72.24,41 v73.15,40.08
  Bottom 0.152: V6.15 68.58,22.1 69.65,23.16 69.65,30.18 | 69.65,30.18 69.65,30.63 68.58,31.7 V5.15 | v72.24,41.91 71.93,41.6 66.45,41.6 64.92,43.13 62.33,43.13 IC3.8 | v73.15,40.08 73.15,38.1 74.98,36.27 74.98,31.09 74.07,30.18 69.65,30.18
N$21  (via drill 0.35)
  Top 0.152: IC3.4 56.26,35.56 | v66.14,7.62 65.53,7.01 64.92,7.01 U3.11 | 69.95,15.09 69.95,16.61 v69.34,17.22 | v73.61,26.36 73.61,31.7 V5.13 | v63.86,17.68 66.45,17.68 69.04,15.09 69.95,15.09 | 69.95,15.09 v69.95,14.94
  Bottom 0.152: v66.14,7.62 66.14,8.23 69.95,12.04 v69.95,14.94 | v69.34,17.22 69.8,17.22 69.95,17.07 70.56,17.07 70.87,17.37 70.87,18.59 70.1,19.36 70.1,21.34 70.71,21.95 72.08,21.95 | 72.08,21.95 73.61,20.42 V6.13 | v73.61,26.36 73.61,26.06 72.08,24.54 72.08,21.95 | v63.86,17.68 63.86,23.47 55.93,31.39 55.47,31.39 54.71,32.16 54.71,35.51 IC3.4
N$22  (via drill 0.35)
  Top 0.152: 73.66,22.28 74.24,22.28 V6.12 | v76.2,26.52 V5.12 | v62.64,13.56 61.87,13.56 61.11,12.8 58.83,12.8 57.61,11.58 57.61,10.06 59.28,8.38 59.59,8.38 U3.5
  Bottom 0.152: V6.12 76.2,20.42 78.03,22.25 78.03,22.86 77.72,23.16 77.72,24.99 v76.2,26.52 74.37,26.52 73.91,26.98 71.93,26.98 69.95,24.99 69.95,22.1 69.49,21.64 69.49,18.9 67.67,17.07 65.08,17.07 | v62.64,13.56 62.64,14.17 65.08,16.61 65.08,17.07 | 65.08,17.07 65.08,22.71 57.15,30.63 IC3.5
N$23  (via drill 0.35)
  Top 0.152: v61.42,12.04 59.74,12.04 U3.2 | v73.91,16.92 76.05,16.92 77.11,15.85 79.4,15.85 81.38,17.83 81.38,20.27 V6.10
  Bottom 0.152: IC3.11 54.71,43.13 55.17,43.13 56.69,41.6 58.06,41.6 59.59,43.13 IC3.9 61.87,41 73.3,41 77.72,36.58 | v61.42,12.04 63.09,12.04 67.67,16.61 73.61,16.61 v73.91,16.92 | 77.72,36.58 78.33,37.19 79.1,37.19 79.7,36.58 79.7,35.2 81.23,33.68 81.23,31.85 V5.10 | 77.72,36.58 77.72,30.79 80.47,28.04 80.92,28.04 82.3,26.67 82.3,21.34 V6.10
N$24  (via drill 0.35)
  Top 0.152: V5.7 79.93,25.48 79.93,36.72 77.09,39.56 77.09,44.42 73.66,47.85 73.66,53.34 73.64,53.31 | 73.64,53.31 73.28,52.96 73.28,52.31 72.76,51.79 72.02,51.79 70.78,53.03 70.74,53.03 70.74,48.26 71.73,47.27 79.11,47.27 82.17,44.21 82.17,43.56 82.55,43.18 82.55,34.91 80.94,33.3 80.91,33.3 80.39,32.78 80.39,32.13 80.01,31.75 80.01,25.4 82.55,22.86 82.55,13.97 V6.7 79.73,11.15 66.04,11.15 65.9,11.01 65.9,10.43 65.77,10.3 | 65.77,10.3 63.88,10.3 63.74,10.43 63.74,12.43 63.88,12.56 64.63,12.56 64.77,12.7 | 65.77,10.3 70.1,10.3 | 70.1,10.3 74.79,10.3 74.93,10.16 75.56,10.79 75.21,11.15 73.29,11.15 72.77,11.67 72.77,13.92 73.24,14.39 | 73.24,14.39 73.97,15.11 73.97,15.37 70.61,18.72 67.64,18.72 67.31,19.05 67.93,19.05 68.21,18.77 68.95,18.77 69.47,19.29 69.47,21.21 70.48,22.23 | 73.24,14.39 80.86,14.39 81.28,13.97 79.63,12.32 79.63,11.67 76.44,8.48 74.88,8.48 74.75,8.35 74.75,7.44 71.75,4.45 | v28.04,63.4 28.04,62.33 U6.2 | v30.02,65.38 30.02,67.36 30.94,68.28 44.04,68.28 45.26,67.06 77.72,67.06 77.88,67.21 78.49,67.21 80.77,64.92 80.77,64.77 81.38,64.16 v81.53,64.16 | v75.29,53.34 73.61,53.34 73.64,53.31 | v58.22,13.26 59.59,13.26 U3.1 | v69.65,8.69 70.1,9.14 70.1,10.3 | 70.1,10.36 70.1,10.3
  Bottom 0.152: v30.02,65.38 v28.04,63.4 | v81.53,64.16 81.53,62.94 80.31,61.72 80.31,59.59 75.74,55.02 75.74,53.8 v75.29,53.34 | v58.22,13.26 58.22,11.28 58.83,10.67 58.83,10.21 63.25,5.79 66.75,5.79 v69.65,8.69
N$25  (via drill 0.35)
  Top 0.152: v78.64,16.92 78.64,18.44 77.72,19.36 77.72,21.95 78.64,22.86 78.64,24.08 V5.6
  Bottom 0.152: v78.64,16.92 78.64,12.8 V6.6
N$26  (via drill 0.35)
  Top 0.152: v21.95,60.81 21.95,62.18 U7.1 | v9.6,60.05 8.38,61.27 v8.23,61.27 | v81.84,37.95 v80.01,37.95 | v82.91,30.02 83.52,29.41 v83.52,26.06 | v76.81,17.53 v74.98,19.36
  Bottom 0.152: v21.95,60.81 12.19,60.81 10.97,59.59 10.06,59.59 v9.6,60.05 | v8.23,61.27 8.23,62.18 8.53,62.48 8.53,64.31 10.97,66.75 38.1,66.75 39.62,65.23 39.62,63.86 44.04,59.44 53.34,59.44 53.95,58.83 57.45,58.83 58.37,57.91 58.37,49.07 61.27,46.18 61.27,42.22 62.18,41.3 76.66,41.3 v80.01,37.95 | v81.84,37.95 81.84,37.49 82.91,36.42 v82.91,30.02 | v83.52,26.06 83.52,25.76 82.6,24.84 82.6,19.66 81.69,18.75 79.55,18.75 78.03,17.22 | 78.03,17.22 78.03,14.63 76.2,12.8 V6.5 | V5.5 76.2,22.25 74.98,21.03 v74.98,19.36 | v76.81,17.53 77.72,17.53 78.03,17.22
N$28  (via drill 0.35)  (1 unrouted)
  Top 0.152: v67.97,1.98 66.75,0.76 3.05,0.76 -2.9,6.71 -2.9,64.16 1.83,68.89 v63.7,68.89
  Bottom 0.152: v67.97,1.98 67.97,3.81 67.06,4.72 64.92,4.72 64.16,3.96 60.5,3.96 60.05,3.5 52.88,3.5 51.36,5.03 50.9,5.03 IC1.5 | v63.7,68.89 83.36,68.89 87.02,65.23 87.02,51.97 85.5,50.44 83.97,50.44 78.79,45.26 78.79,43.28 V4.12
N$29  (via drill 0.35)
  Top 0.152: V4.1 68.58,36.12 70.87,38.41 75.89,38.41 V4.5 | v38.25,32 37.49,31.24 35.66,31.24 U2.13 | v39.47,35.36 v39.47,32.77 | v38.1,38.71 38.1,39.32 v38.71,39.93 | v40.08,39.62 40.08,40.08 41.3,41.3 41.91,41.3 v44.5,38.71 | v50.14,38.71 v48.62,38.71
  Bottom 0.152: v38.25,32 38.71,32 v39.47,32.77 | v39.47,35.36 39.47,37.49 38.25,38.71 v38.1,38.71 | v38.71,39.93 39.78,39.93 v40.08,39.62 | v48.62,38.71 v44.5,38.71 | v50.14,38.71 55.93,38.71 58.37,36.27 58.37,33.07 IC2.8 58.52,32.92 58.52,30.79 62.64,26.67 63.25,26.67 63.55,26.98 63.55,31.24 67.82,35.51 68.58,35.51 V4.1
N$30  (via drill 0.35)
  Top 0.152: 75.23,40.64 75.23,45.85 75.06,46.02 74.8,46.02 74.62,45.85 74.62,44.15 V4.14 | 75.23,40.64 75.23,39.24 75.06,39.06 69.55,39.06 67.61,37.13 67.61,36.7 66.47,35.56 65.2,35.56 64.99,35.34 | 75.23,40.64 78.77,37.11 79.11,37.11 79.63,36.59 79.63,30.72 78.74,29.83 78.74,25.68 78.37,25.68 77.09,24.4 77.09,23.1 76.57,22.58 68.21,22.58 67.69,23.1 67.69,23.75 67.31,24.13 67.23,24.05 67.23,19.6 66.38,18.75 64.64,18.75 63.07,20.32 55.88,20.32 55.88,15.24 56.87,14.25 66.41,14.25 66.69,13.97 67.93,13.97 68.21,14.25 72.67,14.25 73.66,15.24 70.48,18.41 61.18,18.41 60.41,17.64 58.8,17.64 56.77,15.61 56.77,6.11 | 53.71,6.63 48.26,6.63 48.26,8.89 | 49.91,20.42 49.91,20.7 50.8,21.59 | 48.26,8.89 51.45,8.89 | 51.45,8.89 53.71,6.63 | 53.71,6.63 54.99,5.35 54.99,4.05 55.51,3.53 56.25,3.53 56.77,4.05 56.77,6.11 | 48.26,8.89 40.64,8.89 40.64,10.78 41.53,11.67 41.53,13.73 41.01,14.25 40.27,14.25 39.75,13.73 39.75,13.39 39.37,13.01 37.62,14.76 41.65,18.79 41.65,19.75 41.78,19.88 42.74,19.88 43.18,20.32 44.13,20.32 v44.19,20.26 | 56.77,6.11 56.25,6.63 54.95,6.63 49.91,11.67 49.91,20.42 | v44.19,20.26 47.37,17.08 47.37,11.67 47.89,11.15 49.19,11.15 51.45,8.89 | 49.91,20.42 53.34,23.85 | v37.49,27.43 35.66,27.43 U2.10 | v44.2,20.27 v44.19,20.26
  Bottom 0.152: v37.49,27.43 37.49,26.98 41.6,22.86 41.6,22.4 41.91,22.1 44.2,22.1 | 44.2,22.1 47.55,22.1 50.75,25.3 IC2.4 | v44.2,20.27 44.2,22.1
N$31  (via drill 0.35)
  Top 0.152: U2.14 34.84,33.16 34.66,33.16 34.6,33.23 | 46.56,38.1 41.29,38.1 41.01,38.38 40.27,38.38 39.75,37.86 39.75,36.56 38.47,35.28 37.73,35.28 36.45,36.56 36.45,37.86 35.62,38.68 32.89,38.68 32.13,37.92 32.13,35.69 34.6,33.23 | v52.43,16.15 IC1.8 | v33.53,31.09 33.53,32.16 34.6,33.23 | v76.96,48.01 78.94,48.01 82.91,44.04 82.91,30.94 80.62,28.65 v80.62,27.43 | v69.04,29.57 v70.26,29.57 | v65.08,25.6 65.08,24.23 v62.79,21.95
  Bottom 0.152: v52.43,16.15 43.13,16.15 42.52,16.76 | 42.52,16.76 39.78,19.51 39.78,24.23 33.53,30.48 v33.53,31.09 | v76.96,48.01 76.2,48.77 72.08,48.77 71.17,47.85 71.17,43.28 V4.15 | v80.62,27.43 78.18,29.87 70.56,29.87 v70.26,29.57 | v65.08,25.6 v69.04,29.57 | v62.79,21.95 58.52,21.95 58.22,21.64 57.61,21.64 56.39,22.86 54.86,22.86 52.12,20.12 45.87,20.12 42.52,16.76
N$32  (via drill 0.35)
  Top 0.152: v31.85,27.74 31.09,28.5 30.48,28.5 U2.6 | v28.8,24.69 29.41,24.69 v30.33,23.77 | v53.49,10.82 v51.97,10.82 | 53.03,19.36 53.03,21.49 v52.73,21.79 | 53.03,19.36 v53.03,17.22 | v82.91,29.11 82.91,18.9 v85.65,16.15 | v66.29,9.6 v69.49,9.6 | 53.03,19.36 v52.73,19.36
  Bottom 0.152: v28.8,24.69 v31.85,27.74 | v30.33,23.77 31.85,23.77 33.83,25.76 34.9,25.76 36.27,24.38 37.34,24.38 38.56,23.16 38.56,17.98 42.22,14.33 43.59,14.33 44.5,13.41 44.5,11.43 45.11,10.82 v51.97,10.82 | v53.49,10.82 54.25,11.58 54.25,16 v53.03,17.22 | v52.73,21.79 52.73,24.69 53.34,25.3 IC2.5 | v82.91,29.11 83.21,29.11 84.73,30.63 84.73,36.58 81.38,39.93 81.38,43.13 V4.11 | v85.65,16.15 85.65,15.7 85.34,15.39 85.34,11.73 83.21,9.6 v69.49,9.6 | v66.29,9.6 64.92,9.6 63.7,8.38 61.72,8.38 59.44,10.67 59.44,19.2 57,21.64 55.02,21.64 v52.73,19.36
N$33
  Top 0.152: IC6.1 53.72,44.07 53.72,42.15 58.42,37.45 58.42,36.83 59.04,36.83 59.32,37.11 | 62.88,36.83 62.6,37.11 61.95,37.11 | 66.04,36.83 64.77,36.83 | 62.88,36.83 64.77,36.83 | 60.06,37.11 61.95,37.11 | 67.31,36.83 67.31,40.64 68.3,41.63 | 68.3,41.63 68.95,41.63 69.23,41.91 69.85,41.91 | 68.3,41.63 68.21,41.63 66.42,43.42 66.42,46.75 66.94,47.27 68.86,47.27 69.85,48.26 69.85,51.42 68.96,52.31 68.96,59.31 68.58,59.69 70.48,61.59 68.2,63.88 | 68.2,64.14 68.2,63.88 | 68.2,63.88 68.2,63.74 67.68,63.22 56.78,63.22 56.26,63.74 56.26,63.75 55.88,64.14 55.5,63.75 55.5,63.74 50.46,58.7 48.63,58.7 | 48.63,58.7 47.89,58.7 47.37,58.18 47.37,56.2 | 48.63,58.7 50.42,56.91 50.42,56.84 | 60.58,33.4 60.58,33.26 58.79,31.47 56.16,31.47 | 52.97,31.47 49.87,31.47 48.57,30.17 | 48.57,30.17 44.07,25.67 44.07,24.37 43.55,23.85 42.81,23.85 42.29,24.37 42.29,26.43 42.81,26.95 56.16,26.95 56.52,27.3 | 55.56,37.78 56.22,37.11 59.32,37.11 | 55.56,37.78 54.29,39.05 | 50.49,42.84 50.42,42.91 50.42,56.84 | 67.31,36.83 66.04,36.83 | 66.67,37.47 64.77,39.37 60.96,39.37 60.96,38.1 61.95,37.11 | 66.67,37.47 67.31,36.83 | 62.88,36.83 65.15,34.56 65.15,34.29 | 65.15,34.29 65.15,30.72 65.67,30.2 66.04,30.2 66.04,29.83 | 66.04,29.83 66.04,25.68 66.41,25.68 66.93,25.16 66.93,23.1 65.7,21.87 65.67,21.87 65.15,21.35 65.15,19.43 64.77,19.05 61.59,22.23 | 61.59,22.23 60.82,23 60.82,25.13 59,26.95 56.87,26.95 56.52,27.3 | 64.77,36.83 63.12,35.18 63.12,34.53 56.52,27.93 56.52,27.3 | 64.77,36.83 64.68,36.92 | 74.93,45.72 74.93,39.37 54.61,39.37 54.61,40.64 60.96,40.64 62.87,38.73 | 66.04,36.83 64.77,35.56 | 64.77,35.56 64.68,35.47
  Top 0.152: 62.23,33.02 61.59,32.38 | 61.59,32.38 58.42,29.21 | 56.52,27.3 58.42,29.21 | 61.59,22.23 62.23,22.86 62.23,33.02 | 62.23,33.02 64.68,35.47 | 66.04,36.83 66.67,37.47 | 64.77,35.13 64.68,35.22 64.68,35.47 | 64.77,35.13 64.77,27.94 59.69,27.94 58.42,29.21 | 62.87,38.73 64.68,36.92 | 64.68,36.92 64.68,35.47 | 62.87,38.73 61.91,37.78 59.69,37.78 | 59.69,37.78 55.56,37.78 | 66.04,29.83 66.93,30.72 66.93,32.97 64.77,35.13 | 61.59,32.38 60.58,33.4 | 60.06,37.11 59.69,37.48 59.69,37.78 | 47.08,44.73 47.36,44.73 47.88,44.21 47.88,42.91 51.75,39.05 54.29,39.05 | 65.15,34.29 56.77,25.91 56.77,24.26 55.51,23 53.89,23 53.48,22.59 53.48,18.05 53.61,17.92 53.78,17.92 U4.7 | 64.77,35.56 64.77,43.8 63.88,44.69 63.88,47.37 66.04,49.53 64.14,51.44 64.49,51.79 67.68,51.79 | 57.15,54.89 60.06,54.89 61.34,53.61 61.34,52.31 61.86,51.79 62.6,51.79 63.12,52.31 | 63.12,52.31 63.12,54.37 61.89,55.6 61.86,55.6 61.34,56.12 61.34,58.18 66.38,63.22 68.02,63.22 69.94,61.3 69.94,61.05 68.96,60.07 68.96,53.07 67.68,51.79 | 48.57,30.17 51.79,26.95 56.25,26.95 56.77,26.43 56.77,24.51 57.15,24.13 57.53,24.51 57.53,26.43 65.11,34.01 68.95,34.01 69.47,34.53 69.47,36.45 71.12,38.1 | 58.42,29.21 56.16,31.47 | 56.16,31.47 52.97,31.47 | 52.97,31.47 52.45,31.99 52.45,32.26 | 60.06,37.11 60.58,36.59 60.58,33.4 | 60.06,37.11 59.32,37.11 | 50.49,42.84 50.49,53.68 51.7,54.89 54.98,54.89 55.5,54.37 55.5,53.07 60.31,48.26 60.96,48.26 63.12,50.42 63.12,52.31 | 54.29,39.05 50.49,42.84 | 60.96,36.83 60.96,38.94 63.8,41.78 63.8,47.92 67.68,51.79 | IC5.1 50.75,57.15 50.44,56.84 50.42,56.84
N$34  (via drill 0.35)  (1 unrouted)
  Top 0.152: v57.45,8.23 57.45,6.71 58.37,5.79 59.59,5.79 U3.7 | v54.41,9.45 v55.63,8.23 | v46.63,8.23 46.18,8.23 45.87,8.53 40.54,8.53 40.23,8.84 40.23,10.21 39.62,10.82 33.68,10.82 31.85,12.65 V7.11
  Bottom 0.152: v55.63,8.23 v57.45,8.23 | v54.41,9.45 53.8,8.84 47.24,8.84 v46.63,8.23
N$35  (via drill 0.35)
  Top 0.152: IC6.2 54.61,47.21 54.56,47.24 53.65,48.16 v53.65,50.44 | v58.37,15.24 58.98,15.85 59.74,15.85 U4.9 | v44.96,22.71 v48.16,19.51 | v34.29,31.7 36.42,31.7 v37.49,32.77 | v42.98,43.59 v42.98,41.15
  Bottom 0.152: v58.37,15.24 58.37,15.85 57.91,16.31 57.91,18.14 57.61,18.44 51.82,18.44 51.51,18.14 49.53,18.14 v48.16,19.51 | v44.96,22.71 43.89,23.77 41.15,23.77 38.1,26.82 38.1,27.74 34.29,31.55 v34.29,31.7 | v37.49,32.77 38.56,32.77 42.98,37.19 v42.98,41.15 | v42.98,43.59 45.72,46.33 45.72,48.16 47.7,50.14 53.34,50.14 v53.65,50.44 55.63,52.43 55.63,56.24 54.71,57.15 IC5.2
N$36  (via drill 0.35)
  Top 0.152: V7.5 23.14,11.15 21.22,11.15 20.7,11.67 20.7,13.59 19.05,15.24 19.05,29.21 18.49,29.77 | 18.49,29.77 18.25,30.01 17.78,30.01 | v14.17,50.75 14.02,50.6 14.02,49.53 U5.2 | v14.17,37.03 14.94,37.03 v16.15,35.81 | v16.61,29.72 18.44,29.72 18.49,29.77
  Bottom 0.152: v14.17,37.03 v14.17,50.75 | v16.15,35.81 16.15,30.18 v16.61,29.72
N$37  (via drill 0.35)
  Top 0.152: v31.85,30.02 30.79,31.09 30.48,31.09 U2.4 | v51.21,20.73 51.21,21.18 53.49,23.47 54.56,23.47 U4.2 | v35.81,14.17 v41,19.36
  Bottom 0.152: v31.85,30.02 31.85,28.65 25.45,22.25 25.45,20.12 28.19,17.37 28.19,11.73 28.8,11.12 32.77,11.12 34.29,12.65 | v51.21,20.73 45.57,20.73 44.2,19.36 v41,19.36 | 34.29,12.65 v35.81,14.17 | 34.29,12.65 V7.10
N$38  (via drill 0.35)
  Top 0.152: v32,26.06 30.79,27.28 30.48,27.28 U2.7 | v56.69,21.03 56.39,20.73 55.78,20.73 54.86,19.81 54.56,19.81 U4.5 | v56.69,19.05 56.69,17.37 v56.54,17.22 | v43.43,16.76 41.91,16.76 v41.45,16.31
  Bottom 0.152: V7.12 29.26,12.8 29.26,23.62 31.7,26.06 v32,26.06 35.05,26.06 36.42,24.69 37.95,24.69 38.86,23.77 38.86,18.14 40.69,16.31 v41.45,16.31 | v56.69,19.05 v56.69,21.03 | v56.54,17.22 53.95,17.22 53.34,17.83 52.12,17.83 51.05,16.76 v43.43,16.76
N$39  (via drill 0.35)
  Top 0.152: v33.38,19.81 32.46,19.81 v27.58,14.94 | U2.9 35.66,25.91 35.66,24.99 36.27,24.38 v36.27,22.71 v42.22,22.71 | v57.3,17.83 57.76,18.29 59.74,18.29 U4.11 | v44.04,22.71 v48.92,17.83
  Bottom 0.152: v33.38,19.81 v36.27,22.71 | v27.58,14.94 27.58,13.72 26.67,12.8 V7.13 | v57.3,17.83 53.8,17.83 53.49,18.14 51.97,18.14 51.66,17.83 v48.92,17.83 | v42.22,22.71 v44.04,22.71
N$40  (via drill 0.35)
  Top 0.152: v37.03,29.72 35.66,29.72 U2.12 | v39.47,26.36 39.47,26.06 v36.88,23.47 | v32,21.18 25.45,14.63 23.01,14.63 21.64,13.26 21.64,12.8 V7.15 | v57.91,22.25 59.74,22.25 U4.14 | v44.65,27.89 v45.87,29.11
  Bottom 0.152: v37.03,29.72 37.03,29.26 38.86,27.43 38.86,26.98 v39.47,26.36 41,27.89 v44.65,27.89 | v36.88,23.47 34.29,23.47 v32,21.18 | v57.91,22.25 57.45,22.25 56.54,23.16 55.63,23.16 54.25,24.54 54.25,26.52 51.66,29.11 v45.87,29.11
N$41  (via drill 0.35)
  Top 0.152: v56.08,22.25 54.56,22.25 U4.3 | v51.21,18.75 51.21,16.92 50.75,16.46 50.75,15.85 52.27,14.33 53.65,14.33 54.25,13.72 54.25,10.67 v53.19,9.6 | v46.18,9.6 v48.01,9.6 | v66.14,3.81 64.01,3.81 63.4,4.42 63.4,5.94 60.5,8.84 60.35,8.84 59.74,9.45 U3.4 | v67.06,1.98 66.6,1.98 65.99,1.37 60.2,1.37 59.89,1.07 42.52,1.07 v41.6,1.98
  Bottom 0.152: v56.08,22.25 54.71,22.25 v51.21,18.75 | v48.01,9.6 v53.19,9.6 | v46.18,9.6 44.5,7.92 44.5,3.96 43.59,3.05 41.6,3.05 | 41.6,3.05 38.41,3.05 37.8,3.66 37.8,11.73 V7.9 | v66.14,3.81 66.14,2.9 v67.06,1.98 | 41.6,3.05 v41.6,1.98
N$43  (via drill 0.35)
  Top 0.152: v61.11,9.91 63.7,7.32 63.7,5.33 64.47,4.57 64.77,4.57 U3.9 | v60.2,14.94 60.5,15.24 60.66,15.24 60.96,15.54 60.96,16.15 60.05,17.07 59.74,17.07 | v47.55,7.62 46.33,7.62 45.72,8.23 29.11,8.23 24.69,12.65 24.23,12.65 V7.14 | v57.45,15.24 59.28,17.07 59.74,17.07 | 59.74,17.07 U4.10
  Bottom 0.152: v61.11,9.91 61.11,10.97 60.2,11.89 v60.2,14.94 | v47.55,7.62 53.49,7.62 55.02,9.14 55.02,11.58 54.86,11.73 54.86,14.78 55.32,15.24 v57.45,15.24
N$44  (via drill 0.35)
  Top 0.152: v61.57,21.03 59.74,21.03 U4.13 | v62.03,12.8 62.03,9.45 63.09,8.38 64.77,8.38 U3.12 64.92,8.23 66.45,8.23 v68.58,6.1 | v52.27,2.59 v50.44,2.59
  Bottom 0.152: v61.57,21.03 61.57,13.26 v62.03,12.8 | v50.44,2.59 48.92,1.07 30.79,1.07 28.35,3.5 21.18,3.5 19.66,5.03 19.05,5.03 V7.1 | v52.27,2.59 53.49,1.37 68.28,1.37 68.58,1.68 v68.58,6.1
N$46  (via drill 0.35)
  Top 0.152: v76.2,7.16 76.66,7.62 77.11,7.62 U9.4 | v18.14,9.14 18.14,9.75 v17.07,10.82
  Bottom 0.152: v76.2,7.16 75.89,7.16 69.19,0.46 28.8,0.46 26.36,2.9 19.2,2.9 18.14,3.96 v18.14,9.14 | v17.07,10.82 17.07,13.56 16.92,13.72 16.92,14.33 19.05,16.46 24.08,16.46 25.15,17.53 25.15,18.14 24.54,18.75 22.55,18.75 LED2.A
N$47  (via drill 0.35)
  Top 0.152: v58.37,19.05 58.98,19.66 59.74,19.66 U4.12 | v87.33,48.92 87.33,56.54 86.72,57.15 86.72,57.45 78.18,65.99 73.15,65.99 72.39,66.75 54.56,66.75 53.65,65.84 53.65,63.25 v53.8,63.09 | v55.17,62.48 60.96,62.48 61.27,62.18 61.27,58.67 60.96,58.37 60.96,55.63 v61.42,55.17 | IC6.6 64.77,47.4 v65.53,48.16
  Bottom 0.152: v58.37,19.05 58.37,16.31 59.13,15.54 59.13,10.36 63.4,6.1 66.6,6.1 68.89,8.38 68.89,9.91 69.8,10.82 83.97,10.82 85.04,11.89 85.04,26.98 87.33,29.26 v87.33,48.92 | v53.8,63.09 54.56,63.09 v55.17,62.48 | v61.42,55.17 62.33,55.17 63.86,53.65 63.86,52.27 64.47,51.66 65.08,51.66 | 65.08,51.66 65.68,52.27 65.68,56.24 IC5.6 | v65.53,48.16 65.53,51.21 65.08,51.66
N$48  (via drill 0.35)
  Top 0.152: v57.15,23.47 57.15,22.4 55.78,21.03 54.56,21.03 U4.4 | v46.63,29.72 45.11,29.72 v43.89,28.5 | v39.47,27.28 39.01,27.28 37.03,25.3 v36.88,25.3 | v24.38,19.36 v26.06,21.03 | v13.26,16.92 11.58,15.24 8.69,15.24 5.94,17.98 v5.94,27.28 | v31.09,67.51 32.61,67.51 33.07,67.97 43.89,67.97 45.11,66.75 48.31,66.75 50.75,64.31 v50.75,62.48 | v65.38,59.44 63.55,59.44 v62.94,58.83
  Bottom 0.152: v57.15,23.47 55.78,23.47 54.56,24.69 54.56,26.67 51.51,29.72 v46.63,29.72 | v43.89,28.5 40.69,28.5 v39.47,27.28 | v36.88,25.3 36.27,25.3 34.9,26.67 31.7,26.67 v26.06,21.03 | v24.38,19.36 15.7,19.36 v13.26,16.92 | v5.94,27.28 5.94,28.19 4.12,30.02 4.12,34.14 0,38.25 0,56.39 6.71,63.09 6.71,64.62 9.6,67.51 v31.09,67.51 | v50.75,62.48 53.8,59.44 57.3,59.44 58.67,58.06 58.67,56.24 59.89,55.02 60.05,55.02 | 60.05,55.02 61.27,53.8 61.27,51.51 67.06,45.72 IC6.7 | v65.38,59.44 67.21,57.61 67.21,57.15 IC5.7 | v62.94,58.83 61.87,58.83 60.66,57.61 60.66,55.63 60.05,55.02
N$49  (via drill 0.35)
  Top 0.152: v70.56,59.74 70.56,57.76 69.95,57.15 IC5.8
  Bottom 0.152: v70.56,59.74 67.21,63.09 64.47,63.09 64.16,62.79 64.16,59.74 65.99,57.91 65.99,52.73 69.8,48.92 69.8,45.72 IC6.8
N$50
  Bottom 0.152: IC6.10 74.37,53.34 75.44,54.41 75.44,61.87 72.54,64.77 IC5.10
N$51  (via drill 0.35)
  Top 0.152: v70.41,47.7 70.41,51.36 69.95,51.82 69.95,53.34 IC6.11 | v74.83,61.57 76.2,61.57 76.81,60.96 v78.33,60.96 | v81.38,59.28 v79.7,60.96
  Bottom 0.152: v70.41,47.7 70.41,48.16 71.78,49.53 DIS1.7 77.57,49.53 81.38,53.34 v81.38,59.28 | IC5.11 70.41,64.77 73.61,61.57 v74.83,61.57 | v79.7,60.96 v78.33,60.96
N$52  (via drill 0.35)
  Top 0.152: v80.47,53.34 80.92,53.34 84.73,49.53 DIS1.8 | v71.48,59.74 71.48,57.15 v71.17,56.84
  Bottom 0.152: 71.17,50.44 73.91,50.44 76.81,53.34 v80.47,53.34 | 71.17,50.44 69.04,50.44 67.36,52.12 67.36,53.34 IC6.12 | v71.48,59.74 67.36,63.86 67.36,64.77 IC5.12 | 71.17,50.44 v71.17,56.84
N$53